# Altium PCB 4r8.pcbdoc
Units mm, origin at the board's own origin, x right, y up, seen from the top; angles counter-clockwise.
Board outline 41.56 x 37.04 mm, 2 copper layers (Top Layer, Bottom Layer); 1 components, 0 nets, 3 pads, 0 vias.
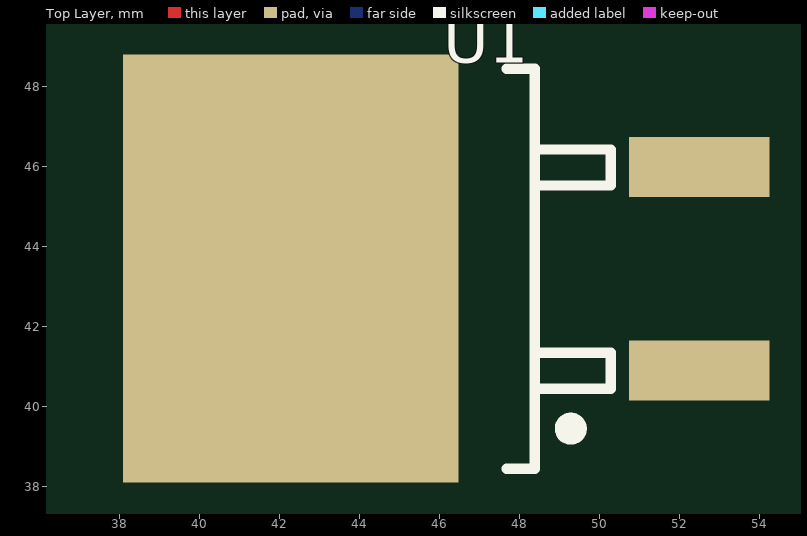
[diagram p0: Top Layer view]
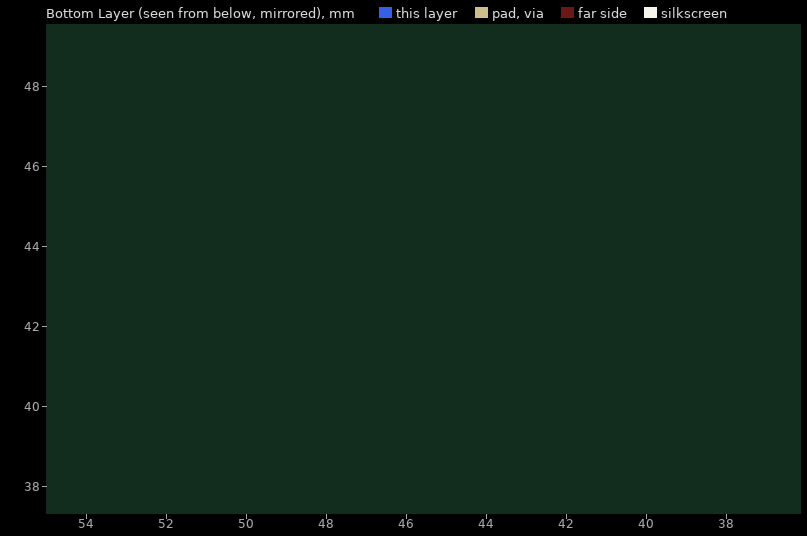
[diagram p1: Bottom Layer view, seen from below]

## Layer stack, top to bottom
Top Layer: signal copper (thickness not stored)
Dielectric: dielectric 0.32, FR-4, Dk 4.8
Bottom Layer: signal copper (thickness not stored)

## Board outline
66.955,25.4 25.4,25.4 25.4,62.436 66.955,62.436

## Components (designator, comment, footprint, x,y, rotation, side; value= is the part's Value field where it differs from the comment)
U1 "TO-263-3_L10.2-W10.7-P5.08-LS16.2-BR" TO-263-3_L10.2-W10.7-P5.08-LS16.2-BR 47.397,43.45 r0 top

## Footprints (in the part's own frame and the unit in brackets; to place one, negate y for a bottom-side part, rotate by r counter-clockwise, add the part's x,y. Pads: shape width x height; smd on the part's side, far side on the other; paste and mask are expansions set on the pad)
TO-263-3_L10.2-W10.7-P5.08-LS16.2-BR [mm]
  rect 3.504x1.5 smd: 1(5.106,-2.54) 3(5.106,2.54)
  rect 8.38x10.7 smd: 2(-5.107,0)
  silkscreen extent 0.29,-5 2.89,5

## Nets (pads, with @x,y where several pads share a name; then routed paths per layer and width w, separated by ;. In a path a pad name is that pad's centre, name@x,y a point inside that pad or via, vN(x,y) a via of type N, cw(c..) or ccw(c..) an arc to the next point about the centre after c; other vN are vias at no path point)
pads on no net: U1.1 U1.2 U1.3

## Silkscreen, mask and mechanical layers (free items; w line width, h text height)
Document:
  lines w0.003: 46.152,43.893 46.203,43.944